# EAGLE board USB_power (EAGLE 6.6.0)
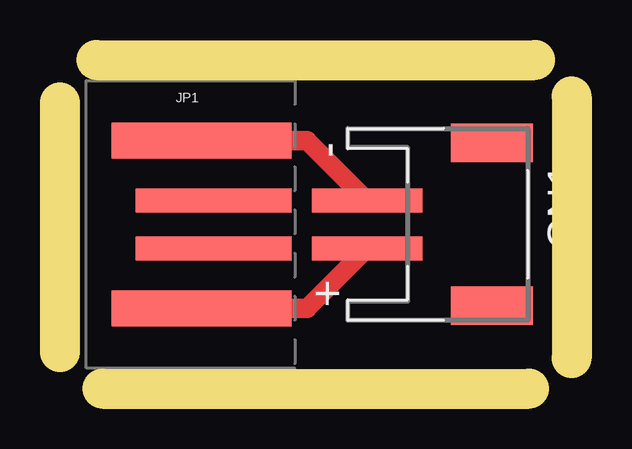
[diagram p0: board, top side]

Size 21.34 x 13.72 mm. Coordinates in mm from the lower left corner, seen from the top.
Outline: 0,1.52 0,11.94
Outline: 1.52,13.72 19.81,13.72
Outline: 21.34,12.19 21.34,1.27
Outline: 1.78,0 19.56,0
Copper layers (1*16): Top 0.035mm / dielectric 1.5mm / Bottom 0.035mm
Design rules "default": minimum track width 10mil, minimum drill 24mil, track to track 8mil, track to pad 8mil, pad to pad 8mil, via to via 8mil, smd to smd 8mil, copper to edge 40mil, drill to drill 8mil, minimum pad ring 10mil, minimum via ring 8mil, stop-mask expansion 4mil, vias tented up to drill 0mil, thermal gap 10mil

## Footprints (pad centres in the part's own frame; a part is rotated, then mirrored left to right if it is on the bottom)
JST-PH-2-SMT-RA = smd 1 x 4.6: 1 1,-3.7; 2 -1,-3.7 | smd 1.6 x 3.4: NC1 -3.4,1.5; NC2 3.4,1.5
USB-A-PCB = smd 7.5 x 1.5: 5V -0.2,-3.5; GND -0.2,3.5 | smd 6.5 x 1: USB_M 0.3,-1; USB_P 0.3,1

## Placement (x,y rotation side)
CN1  [JST-PH-2-SMT-RA]  16.51,6.86 270 top
JP1  USBPCB  [USB-A-PCB]  6.1,6.86 0 top

## Library data of the parts
CN1 = adafruit
JP1 = SparkFun-Connectors

## Nets
N$1: CN1.2 JP1.GND
N$2: CN1.1 JP1.5V

## Tracks (layer width: path | path; a pad name or v marks a point on that pad's centre or on a via)
N$1
  Top 0.813: JP1.GND 10.31,10.36 CN1.2
N$2
  Top 0.813: JP1.5V 10.31,3.36 CN1.1